# Altium PCB PCB1.PcbDoc
Units mm, origin at the board's own origin, x right, y up, seen from the top; angles counter-clockwise.
Board outline 112.14 x 90.93 mm, 2 copper layers (Top Layer, Bottom Layer); 45 components, 32 nets, 163 pads, 21 vias.
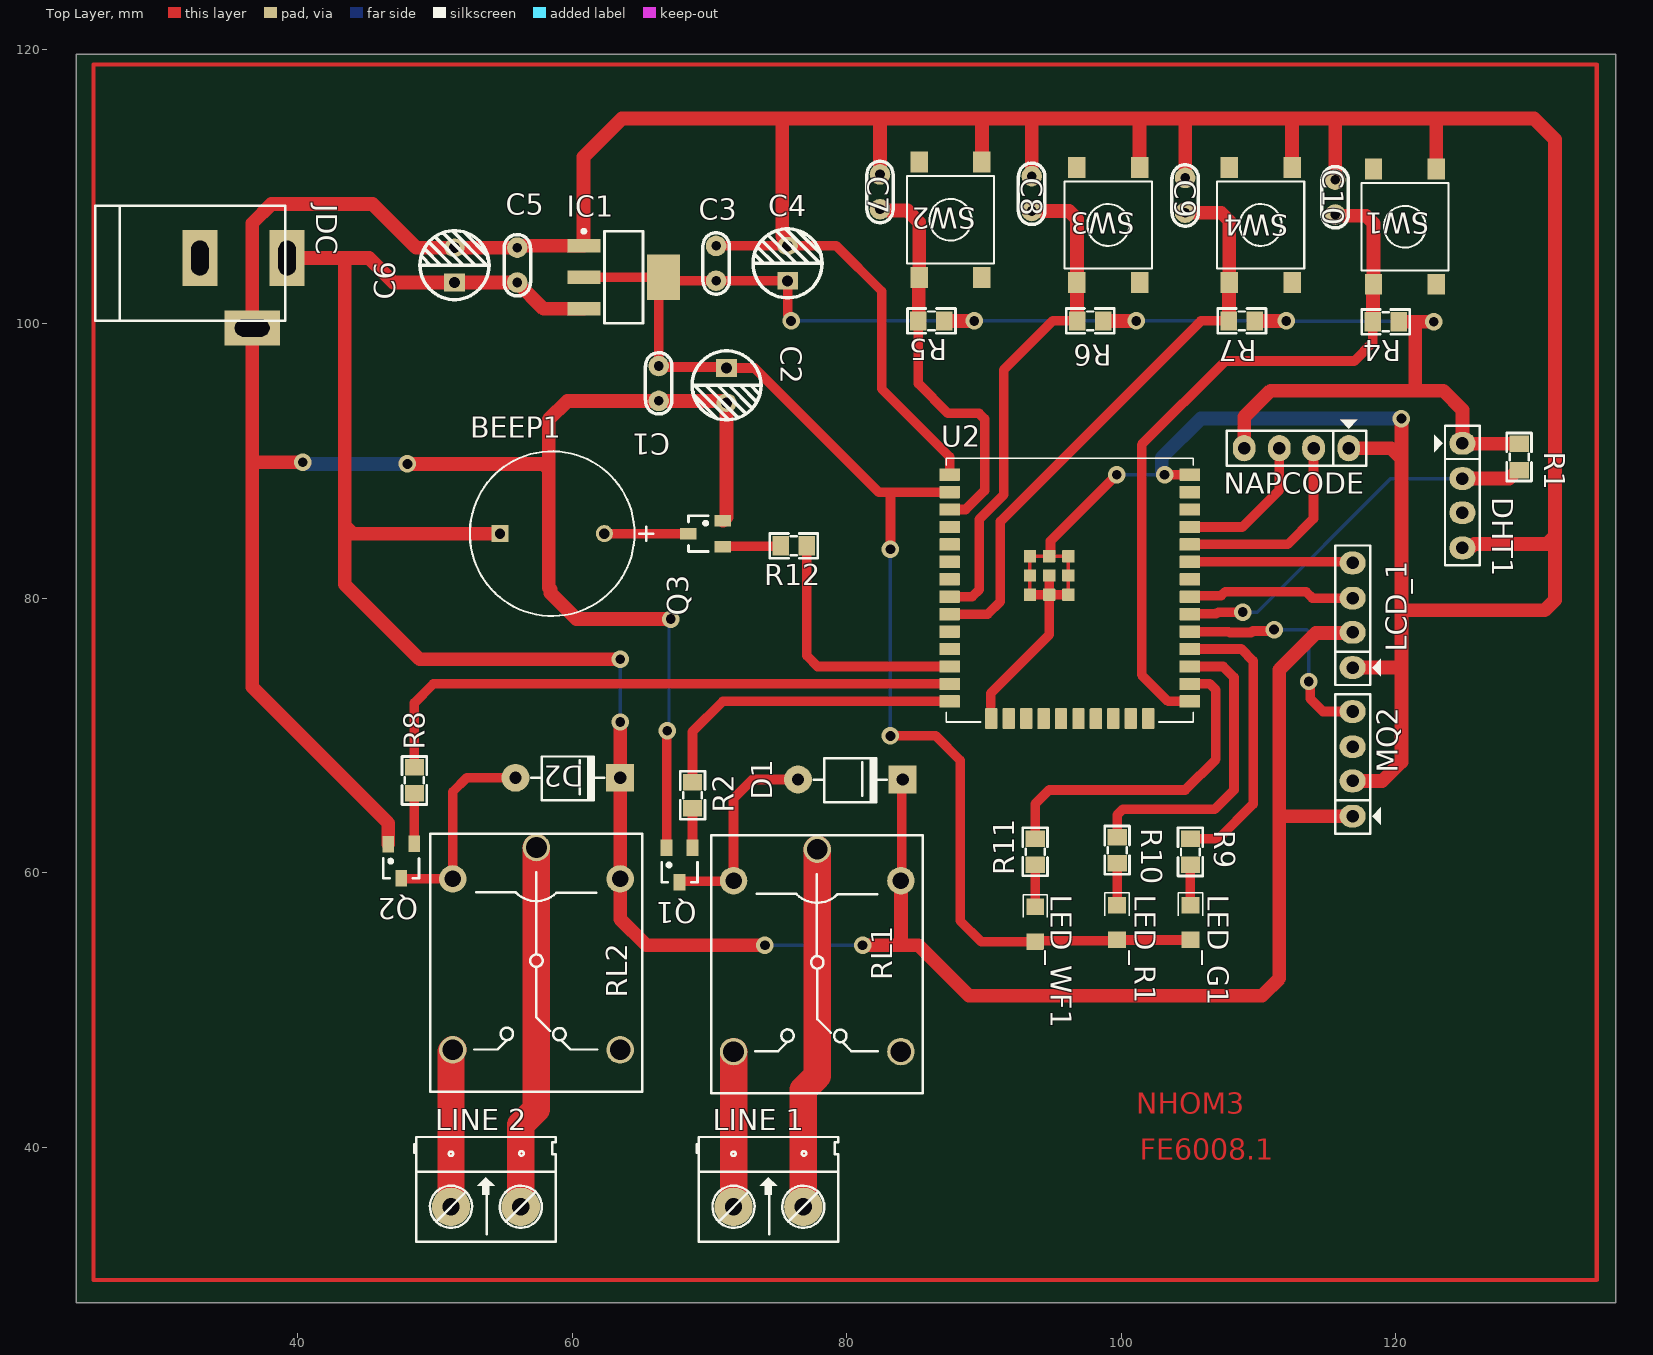
[diagram p0: Top Layer view]
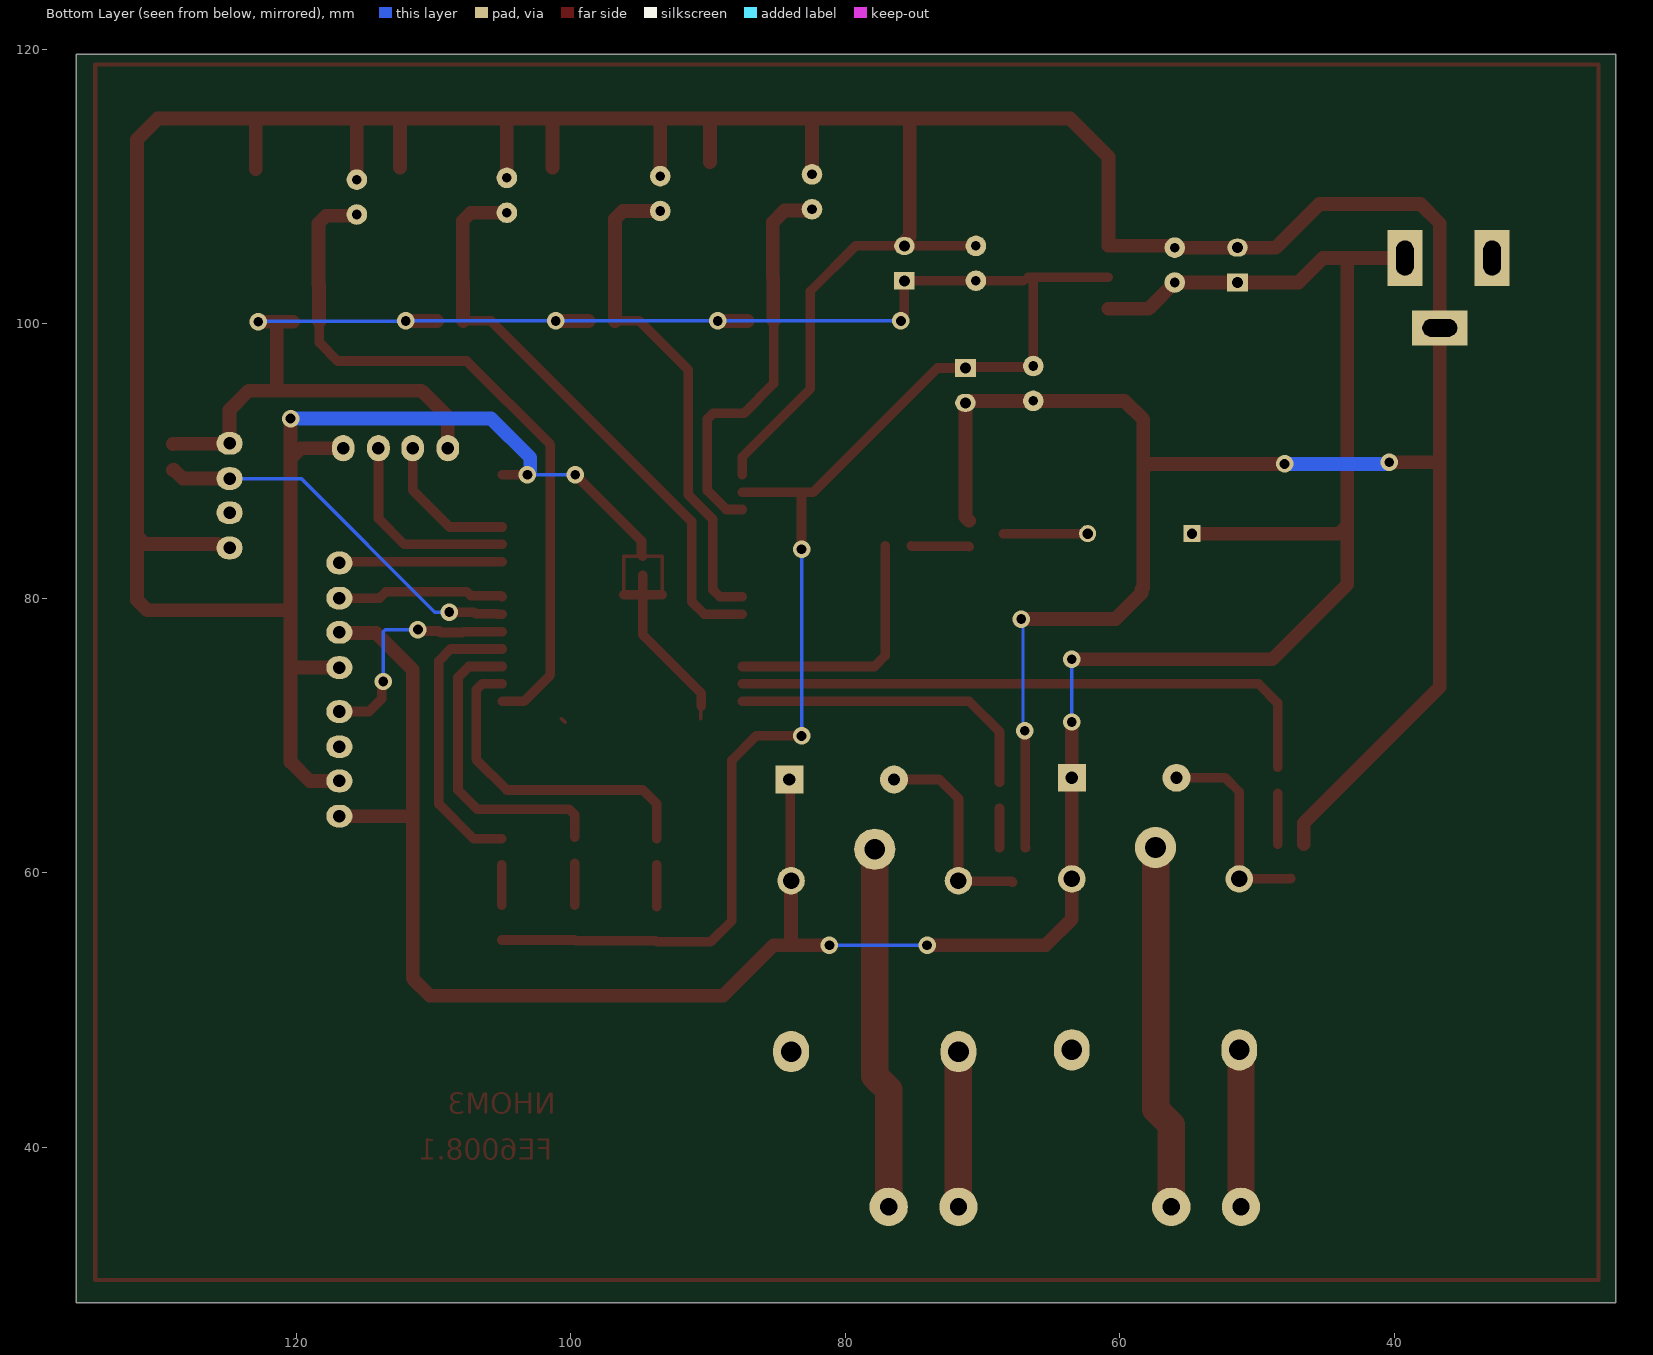
[diagram p1: Bottom Layer view, seen from below]
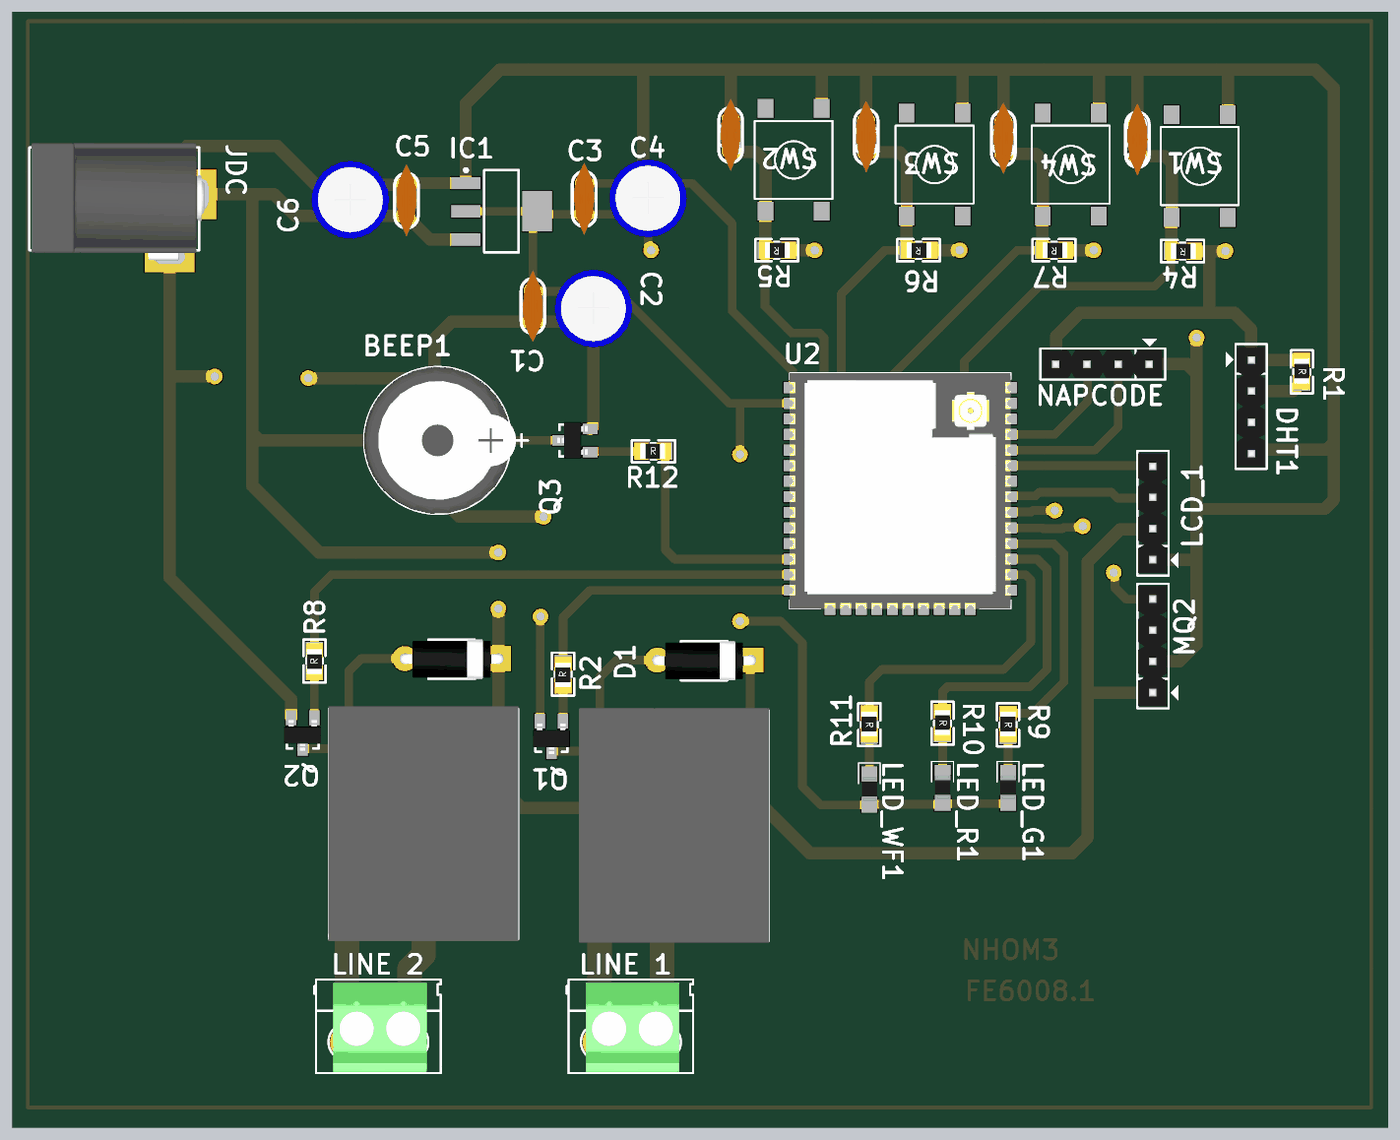
[diagram p2: 3D render of the assembled board from above, using the file's embedded part models]

## Layer stack, top to bottom
Top Solder: solder mask 0.0102, Solder Resist, Dk 3.5
Top Layer: signal copper 0.0356
Dielectric 1: dielectric 0.32, FR-4, Dk 4.8
Bottom Layer: signal copper 0.0356
Bottom Solder: solder mask 0.0102, Solder Resist, Dk 3.5

## Board outline
23.876,28.702 23.876,119.634 136.017,119.634 136.017,28.702

## Design rules (kind name [scope] priority, off if disabled: settings)
Clearance [All] p1: gap=0.5 ignorepadtopadclearanceinfootprint=FALSE
PolygonConnect [All] p1: connectstyle=Relief reliefconductorwidth=0.254 reliefentries=4 polygonreliefangle="90 Angle" airgapwidth=0.254
RoomDefinition Sheet1 [InComponentClass('Sheet1')] p1: confinementstyle=ConfineIn formatcopy=TRUE lockcomponents=FALSE outline 0,0 50.8,0 50.8,25.4 0,25.4
RoutingVias [All] p1: holewidth=0.711 width=1.27 viastyle="Through Hole" minholewidth=0.711 minwidth=1.27 maxholewidth=0.711 maxwidth=1.27
SolderMaskExpansion [All] p1: expansion=0.102 istentingtop=FALSE
Width [All] p1: maxlimit=2 minlimit=0.7 preferedwidth=1
30 further rules are at their usual default settings.

## Components (designator, comment, footprint, x,y, rotation, side; value= is the part's Value field where it differs from the comment)
BEEP1 "MCKPX-G1203A-K4056" FP-MCKPX-G1203A-K4056-MFG 58.547,84.709 r0 top
C1 "104" "tu gom" 66.307,95.645 r270 top
C2 "100uF" "tu hoa 5mm" 71.247,95.504 r270 top
C3 "104" "tu gom" 70.485,104.394 r90 top
C4 "100uF" "tu hoa 5mm" 75.692,104.394 r90 top
C5 "104" "tu gom" 56.007,104.267 r90 top
C6 "100uF" "tu hoa 5mm" 51.435,104.267 r90 top
C7 "104" "tu gom" 82.423,109.601 r90 top
C8 "104" "tu gom" 93.472,109.474 r90 top
C9 "104" "tu gom" 104.648,109.347 r90 top
C10 "104" "tu gom" 115.57,109.22 r90 top
D1 "100v" "DIODE 1A" 75.184,66.802 r180 top
D2 "100v" "DIODE 1A" 54.61,66.929 r180 top
DHT1 "DHT22" jp4 124.841,88.748 r270 top
IC1 "LM1117" SOT223-4N 63.754,103.378 r0 top value=LM317
JDC "Jac DC" DC-IN 36.068,102.235 r0 top
LCD_1 "LCD" jp4 116.84,77.495 r90 top
LED_G1 "LED_G" LED-0805 105.029,56.388 r90 top value="LED 3 ly Single Colour"
LED_R1 "LED" LED-0805 99.695,56.388 r90 top value="LED 3 ly Single Colour"
LED_WF1 "LED" LED-0805 93.726,56.261 r90 top value="LED 3 ly Single Colour"
"LINE 1" "CON 2 KF301" "Con 2 KF301 5.08" 71.755,35.687 r0 top
"LINE 2" "CON 2 KF301" "Con 2 KF301 5.08" 51.181,35.687 r0 top
MQ2 "LCD" jp4 116.84,66.675 r90 top
NAPCODE "LCD" jp4 114.021,90.932 r180 top
Q1 "C1815" SOT23B 67.818,60.579 r180 top
Q2 "C1815" SOT23B 47.549,60.858 r180 top
Q3 "C1815" SOT23B 69.723,84.709 r90 top
R1 "10k" "tro smd 0805" 129.032,90.297 r270 top
R2 "1k" "tro smd 0805" 68.707,65.659 r90 top
R4 "10k" "tro smd 0805" 119.253,100.076 r180 top
R5 "10k" "tro smd 0805" 86.171,100.142 r180 top
R6 "10k" "tro smd 0805" 97.728,100.142 r180 top
R7 "10k" "tro smd 0805" 108.777,100.142 r180 top
R8 "1k" "tro smd 0805" 48.453,66.737 r90 top
R9 "220" "tro smd 0805" 105.09,61.533 r270 top
R10 "220" "tro smd 0805" 99.756,61.66 r270 top
R11 "220" "tro smd 0805" 93.787,61.538 r270 top
R12 "1k" "tro smd 0805" 76.135,83.881 r0 top
RL1 "Relay" RL_SPDT_10A 77.851,61.722 r270 top value="Relay SPDT, 10A, 12V"
RL2 "Relay" RL_SPDT_10A 57.404,61.849 r270 top value="Relay SPDT, 10A, 12V"
SW1 "SW" SW4_SMD 120.65,107.061 r270 top value="SW chip 2 pin"
SW2 "SW" SW4_SMD 87.557,107.569 r270 top value="SW chip 2 pin"
SW3 "SW" SW4_SMD 99.042,107.188 r270 top value="SW chip 2 pin"
SW4 "SW" SW4_SMD 110.145,107.188 r270 top value="SW chip 2 pin"
U2 "ESP32-WROOM-32UE" ESP32-WROOM-32UE 96.242,90.194 r0 top

## Footprints (in the part's own frame and the unit in brackets; to place one, negate y for a bottom-side part, rotate by r counter-clockwise, add the part's x,y. Pads: shape width x height; smd on the part's side, far side on the other; paste and mask are expansions set on the pad)
"Con 2 KF301 5.08" [mil]
  round 110 hole 50: 1(0,0) 2(200,0)
  silkscreen extent -106,-100 300,200, body extent -45,-97 255,190, height 335
DC-IN [mil] "Jac DC input"
  rect 100x160 hole 50 slot 100 at 90 deg: 1(125,100) 2(-125,100)
  rect 160x100 hole 50 slot 100 at 0 deg: 3(25,-100)
  silkscreen extent -425,-80 120,250, body extent -418,-113 137,265, height 433
"DIODE 1A" [mil] "Diode 1A"
  round 80 hole 35: 1(-50,0)
  rect 80x80 hole 35: 2(-350,0)
  silkscreen extent -305,-61 -95,65, body extent -366,-61 -34,65, height 122
ESP32-WROOM-32UE [mm]
  rrect10% 1.5x0.9 smd: 1(-8.75,-1.19) 2(-8.75,-2.46) 3(-8.75,-3.73) 4(-8.75,-5) 5(-8.75,-6.27) 6(-8.75,-7.54) 7(-8.75,-8.81) 8(-8.75,-10.08) 9(-8.75,-11.35) 10(-8.75,-12.62) 11(-8.75,-13.89) 12(-8.75,-15.16) 13(-8.75,-16.43) 14(-8.75,-17.7) 25(8.75,-17.7) 26(8.75,-16.43) 27(8.75,-15.16) 28(8.75,-13.89) 29(8.75,-12.62) 30(8.75,-11.35) 31(8.75,-10.08) 32(8.75,-8.81) 33(8.75,-7.54) 34(8.75,-6.27) 35(8.75,-5) 36(8.75,-3.73) 37(8.75,-2.46) 38(8.75,-1.19)
  rrect10% 0.9x1.5 smd: 15(-5.715,-18.95) 16(-4.445,-18.95) 17(-3.175,-18.95) 18(-1.905,-18.95) 19(-0.635,-18.95) 20(0.635,-18.95) 21(1.905,-18.95) 22(3.175,-18.95) 23(4.445,-18.95) 24(5.715,-18.95)
  rrect10% 0.9x0.9 smd: 39(-2.9,-9.93) 39(-2.9,-8.53) 39(-2.9,-7.13) 39(-1.5,-9.93) 39(-1.5,-8.53) 39(-1.5,-7.13) 39(-0.1,-9.93) 39(-0.1,-8.53) 39(-0.1,-7.13)
  silkscreen extent -9,-19.2 9,0, body extent -9,-19.2 9,0, height 3.23
FP-MCKPX-G1203A-K4056-MFG [mm]
  rect 1.25x1.25 hole 0.75 paste-1000 mask+0: 1(-3.8,0)
  round 1.25 hole 0.75 paste-1000 mask+0: 2(3.8,0)
  silkscreen extent -6,-6 7.35,6, body extent -6.1,-6.1 6.1,6.1, height 0.25
jp4 [mil] "Jumper 4"
  oval 65x75 hole 36: 1(-100,0) 2(1,0) 3(99,0) 4(200,0)
  silkscreen extent -150,-81 250,50, body extent -141,-45 243,47, height 320
LED-0805 [mm] "Resistor SMD 80x50mil"
  rect 1.2x1.3 smd: 1(-1.27,0) 2(1.27,0)
  silkscreen extent 0.5,-0.89 2.16,0.89, body extent -0.97,-0.64 1.03,0.62, height 0.58
RL_SPDT_10A [mm] "Relay SPDT, 5 pin, 10A,W 650mil, L 800mil, H 800mil"
  round 2 / inner round 3 / far side round 3 hole 1.5: 1(0,0)
  round 2 / inner round 3 / far side oval 3x2.6 hole 1.5: 2(14.732,6.096) 3(14.732,-6.096)
  round 2 hole 1.2: 4(2.286,-6.096) 5(2.286,6.096)
  silkscreen extent -1.02,-7.72 17.78,7.7, body extent -1.17,-7.78 17.93,7.72, height 15.2
SOT23B [mm] "SOT 23B"
  rect 0.85x1.2 smd: 1(0.94,-1.245) 2(0,1.25) 3(-0.95,-1.25)
  silkscreen extent -1.31,-0.2 1.29,1.25, body extent -1.5,-1.07 1.5,1.43, height 1.05
SOT223-4N [mm] "SOT223, 4-Leads, Body 6.5x3.5mm, Pitch 2.3mm, Lead Span 7mm, IPC Medium Density"
  rect 2.4x1 smd: 1(-2.9,2.3) 2(-2.9,0) 3(-2.9,-2.3)
  rect 2.4x3.3 smd: 4(2.9,0)
  silkscreen extent -3.02,-3.35 1.4,3.47, body extent -1.85,-3.35 1.85,3.35, height 1.8
SW4_SMD [mil] "SW SMD button 4pin, 250 x250 mil"
  rect 60x50 smd: 1(-165,90) 2(165,-90) 3(165,90) 4(-165,-90)
  silkscreen extent -125,-125 125,125, body extent -180,-125 180,125, height 130
"tro smd 0805" [mm]
  rect 1.2x1.4 smd: 1(-0.946,-0.061) 2(0.954,-0.061)
  silkscreen extent -1.75,-0.97 1.75,0.84, body extent -1.56,-0.76 1.44,0.64, height 0.53
"tu gom" [mm] "Tu gom mini"
  round 1.5 hole 0.7: 1(-1.27,0) 2(1.27,0)
  silkscreen extent -2.25,-0.97 2.22,0.97, body extent -2.92,-0.85 2.92,0.85, height 6.12
"tu hoa 5mm" [mm]
  rect 1.3x1.5 hole 0.8: 1(-1.27,0)
  oval 1.3x1.5 hole 0.8: 2(1.27,0)
  silkscreen extent -2.51,-2.51 2.51,2.51, body extent -3.12,-3.18 3.23,3.18, height 14.55

## Part data
BEEP1: library part CMP-12433-000001-1, "MAGNETIC BUZZER AND TRANSDUCER - More Details", Current=30mA, Frequency=2300Hz, Manufacturer="Multicomp Pro", Max Supply Voltage=5V, Min Supply Voltage=2V, Operating Supply Voltage=3V, Package=0, Temperature="-20°C to +70°C", Temperature Range High=+70°C, Temperature Range Low=-20°C, Automotive=No, Category=Speak, ComponentLink2Description=Datasheet, ComponentLink2URL=http://www.farnell.com/datasheets/1498149.pdf?_ga=2.17855225.1157923166.1572356775-536200964.1569240579, Device Class L1=Electromechanical, Device Class L2="Audio Products", Device Class L3=Buzzers, Height=9.5mm, Lead Free=Yes, Manufacturer Part Number=MCKPX-G1203A-K4056, Octopart=https://octopart.com/mckpx-g1203a-k4056-multicomp-12157154, RoHS=TRUE, Standoff Height=0.5mm
C1 C3 C5 C7 C8 C9 C10: library part "Tu gom 104 50V", "Cắm", Chung_Loai=Cắm, Don_Vi=Con, Ma_Hang=MH004761, So_Chan=2, Ten_Linh_Kien="Tụ gốm 104 100nF 50V"
C2 C4 C6: library part "Tu Hoa 100uF 16V 5x11", "Cắm", Chung_Loai=Cắm, Don_Vi=Con, Ma_Hang=MH008417, So_Chan=2, Ten_Linh_Kien="Tụ Hóa 100uF 16V 5x11MM"
D1 D2: library part "Diode 1N4007", "Cắm", Chung_Loai=Cắm, Don_Vi=Con, Ma_Hang=MH001063, Ten_Linh_Kien="Diode 1N4007 1A (DIP)"
DHT1 LCD_1 MQ2 NAPCODE: library part DHT1x, "Humidity and Temperature Sensor"
IC1: "3v3"
JDC: library part DCIN, "Jac DC input"
LED_G1: library part LED, "LED Single colour Green and Red"
LED_R1 LED_WF1: "LED Single colour Green and Red"
"LINE 1" "LINE 2": "Cắm", Chung_Loai=Cắm, Don_Vi=Con, Ma_Hang=MH000987, Ten_Linh_Kien="CON 2 KF301-2P 5.08MM Xanh Dương"
Q1 Q2 Q3: "NPN 600mW, ECB"
R1 R2 R4 R5 R6 R7 R8 R12: library part "Tro 0805 5% 0R", "Dán", Chung_Loai=Dán, Don_Vi=Con, Ma_Hang=MH005230, So_Chan=2, Ten_Linh_Kien="Trở 0805 5% 0R"
R9 R10 R11: library part "Tro 0805 1% 1R", "Dán", Chung_Loai=Dán, Don_Vi=Con, Ma_Hang=MH004177, So_Chan=2, Ten_Linh_Kien="Trở 0805 1% 1R"
RL1 RL2: library part "Relay 1", "Relay SPDT 5 Pin"
SW1 SW2 SW3 SW4: library part SW2, "Switch button 2 pin"
U2: "Rx Txrx Module Wifi U.fl SMD", Manufacturer 1="Espressif Systems", Manufacturer Part Number 1=ESP32-WROOM-32UE(M113EH3200UH3Q0), Supplier Part Number 1=1965-ESP32-WROOM-32UE-N4TR-ND, Category="RF Receivers, Transceivers", Description 1="Rx Txrx Module Wifi U.fl SMD", Pricing 1="650=3,00000 (USD)", RoHS=No, Stock=10282, Supplier 1=Digi-Key

## Via types
v1: diameter 1.27, hole 0.711, Top Layer to Bottom Layer, 21 vias

## Nets (pads, with @x,y where several pads share a name; then routed paths per layer and width w, separated by ;. In a path a pad name is that pad's centre, name@x,y a point inside that pad or via, vN(x,y) a via of type N, cw(c..) or ccw(c..) an arc to the next point about the centre after c; other vN are vias at no path point)
3.3V: C1.1 C2.1 C3.1 C4.1 DHT1.1 IC1.2 IC1.4 LED_G1.1 LED_R1.1 LED_WF1.1 NAPCODE.4 R1.1 R4.1 R5.1 R6.1 R7.1 U2.2 | length 196.7
  Top Layer w0.254: NAPCODE.4 NAPCODE.4@108.941,91.059 ; 112.014,94.869 119.126,94.869 119.38,95.123
  Top Layer w0.7: IC1.2 IC1.4 66.307,103.031 C1.1 66.377,96.845 71.176,96.845 C2.1 73.279,96.774 82.319,87.734 83.312,87.734 ; IC1.4@67.056,103.124 C3.1 C4.1 75.692,100.611 75.946,100.357 v1(75.946,100.203) ; v1(83.185,69.977) 86.487,69.977 88.265,68.199 88.265,56.515 89.789,54.991 LED_WF1.1 93.789,55.054 99.632,55.054 LED_R1.1 LED_G1.1 ; v1(83.185,83.566) 83.185,87.607 83.312,87.734 ; U2.2 83.312,87.734
  Top Layer w1: R5.1 v1(89.281,100.203) ; R6.1 v1(101.092,100.203) ; NAPCODE.4@108.941,91.059 108.941,93.193 110.871,95.123 119.38,95.123 121.412,95.123 ; R7.1 v1(112.014,100.203) ; R4.1 121.473,100.137 ; v1(122.748,100.137) 121.473,100.137 ; R1.1 128.949,91.265 124.864,91.265 DHT1.1 124.841,93.726 123.444,95.123 121.412,95.123 ; 121.412,95.123 121.412,100.075 121.473,100.137
  Bottom Layer w0.254: v1(75.946,100.203) v1(89.281,100.203) v1(101.092,100.203) v1(112.014,100.203) 112.047,100.17 122.715,100.17 v1(122.748,100.137) ; v1(83.185,69.977) v1(83.185,83.566)
5V: BEEP1.1 C5.1 C6.1 D1.2 D2.2 IC1.3 JDC.1 LCD_1.2 MQ2.1 RL1.5 RL2.5 | length 196.9
  Top Layer w0.7: RL1.5 84.01,59.499 84.01,66.739 D1.2
  Top Layer w1: JDC.1 43.434,104.775 ; BEEP1.1 44.02,84.709 43.434,85.295 ; IC1.3 57.926,101.078 C5.1 C6.1 46.99,102.997 45.212,104.775 43.434,104.775 ; v1(63.5,70.993) D2.2 RL2.5 63.5,56.642 65.405,54.737 v1(74.041,54.737) ; v1(63.5,75.565) 48.895,75.565 43.434,81.026 43.434,85.295 ; v1(81.153,54.737) 83.947,54.737 ; RL1.5 83.947,54.737 ; MQ2.1 111.506,64.135 ; LCD_1.2 116.789,77.47 114.173,77.47 111.506,74.803 111.506,64.135 ; 43.434,85.295 43.434,104.775 ; 83.947,54.737 85.217,54.737 88.9,51.054 110.236,51.054 111.506,52.324 111.506,64.135
  Bottom Layer w0.254: v1(63.5,70.993) v1(63.5,75.565) ; v1(74.041,54.737) v1(81.153,54.737)
BEEP: R12.2 U2.12 | length 18.7
  Top Layer w0.7: R12.2 77.089,75.819 77.874,75.034 U2.12
DATA_DHT22: DHT1.2 R1.2 U2.30 | length 28.3
  Top Layer w0.7: U2.30 105.362,78.844 105.392,78.874 106.924,78.874 107.044,78.994 v1(108.839,78.994)
  Top Layer w1: DHT1.2 128.251,88.722 128.871,89.343 R1.2
  Bottom Layer w0.254: v1(108.839,78.994) 108.847,78.986 109.893,78.986 119.629,88.722 DHT1.2
DATA_MQ2: MQ2.4 U2.29 | length 17.2
  Top Layer w0.7: U2.29 107.831,77.574 107.896,77.509 109.454,77.509 109.56,77.615 111.016,77.615 v1(111.125,77.724) ; v1(113.64,73.939) 113.749,73.83 113.749,72.687 114.681,71.755 MQ2.4
  Bottom Layer w0.254: v1(111.125,77.724) 113.491,77.724 113.64,77.575 v1(113.64,73.939)
DOWN: C9.1 R7.2 SW4.2 U2.9 | length 43.4
  Top Layer w0.7: U2.9 90.268,78.844 91.186,79.762 91.186,85.598 105.791,100.203 R7.2
  Top Layer w1: C9.1 107.274,108.077 107.859,107.491 SW4.2 107.841,102.979 107.841,100.221 R7.2
GND: C1.2 C2.2 C3.2 C4.2 C5.2 C6.2 C7.2 C8.2 C9.2 C10.2 DHT1.4 IC1.1 JDC.3 LCD_1.1 MQ2.2 NAPCODE.1 Q1.1 Q2.1 Q3.1 SW1.1 SW2.1 SW3.1 SW4.1 U2.1 U2.15 U2.38 U2.39 | length 456.5
  Top Layer w0.254: C4.2 C4.2@75.885,105.664 ; U2.15 90.527,72.136 ; U2.39@93.342,80.264 93.342,81.664 93.342,83.064 94.742,83.064 96.142,83.064 96.142,81.664 U2.39@96.142,80.264 ; SW1.1 123.063,111.379 123.063,114.935
  Top Layer w0.7: Q1.1 66.904,61.849 66.904,70.333 v1(66.929,70.358) ; C3.2 C4.2 ; C4.2@75.885,105.664 79.248,105.664 82.55,102.362 82.55,95.25 87.492,90.308 U2.1 ; 90.497,72.136 90.497,73.098 94.742,77.343 U2.39@94.742,80.264 ; U2.39@93.342,80.264 U2.39@94.742,80.264 ; U2.39@94.742,81.664 U2.39@94.742,80.264 ; U2.39@94.742,83.064 94.842,83.164 94.842,84.174 v1(99.672,89.004) ; U2.39@96.142,80.264 U2.39@94.742,80.264 ; v1(103.147,89.004) U2.38
  Top Layer w1: v1(40.386,89.916) 36.703,89.916 ; Q2.1 46.609,63.627 36.703,73.533 36.703,89.916 ; v1(48.006,89.789) 57.912,89.789 58.293,89.408 ; IC1.1 IC1.1@60.833,105.678 ; v1(67.183,78.486) 60.325,78.486 58.42,80.391 58.42,80.645 58.293,80.772 58.293,89.408 ; Q3.1 70.993,85.649 71.247,85.903 C2.2 71.066,94.234 70.924,94.375 C1.2 59.655,94.375 58.293,93.013 58.293,89.408 ; C4.2 75.673,105.664 75.535,105.803 75.535,106.134 75.311,106.357 75.311,114.681 75.565,114.935 ; C7.2 82.423,114.935 ; SW2.1 89.843,114.935 ; C8.2 93.472,114.935 ; SW3.1 101.328,114.663 101.6,114.935 ; C9.2 104.648,114.808 104.775,114.935 ; SW4.1 112.431,114.935 ; C10.2 115.57,114.935 ; NAPCODE.1 119.634,90.932 120.396,90.17 ; MQ2.2 118.999,66.7 120.371,68.072 120.396,68.072 120.396,74.93 ; LCD_1.1 120.371,74.955 120.396,74.93 ; v1(120.396,93.091) 120.396,90.17 ; SW1.1 122.936,114.808 123.063,114.935 ; DHT1.4 124.966,83.792 125.553,83.792 125.708,83.947 130.986,83.947 131.572,84.533 ; 36.703,89.916 JDC.3 36.703,107.315 38.1,108.712 45.466,108.712 48.641,105.537 C6.2 C5.2 56.142,105.537 56.283,105.678 IC1.1@60.833,105.678 ; IC1.1@60.833,105.678 60.833,112.141 63.627,114.935 75.565,114.935 ; 75.565,114.935 82.423,114.935 ; 82.423,114.935 89.843,114.935 ; 89.843,114.935 93.472,114.935 ; 93.472,114.935 101.6,114.935 ; 101.6,114.935 104.775,114.935 ; 104.775,114.935 112.431,114.935 ; 112.431,114.935 115.57,114.935 ; 115.57,114.935 123.063,114.935 ; 120.396,74.93 120.396,79.121 ; 120.396,79.121 120.396,90.17 ; 120.396,79.121 130.81,79.121 131.572,79.883 131.572,84.533 ; 123.063,114.935 130.048,114.935 131.572,113.411 131.572,84.533
  Bottom Layer w0.254: v1(66.929,70.358) 67.056,70.485 67.056,78.359 v1(67.183,78.486) ; v1(99.672,89.004) v1(103.147,89.004)
  Bottom Layer w1: v1(40.386,89.916) 40.459,89.916 40.586,89.789 v1(48.006,89.789) ; v1(103.147,89.004) 103.147,89.077 102.935,89.289 102.935,90.235 105.791,93.091 v1(120.396,93.091)
LED_GREEN: R9.1 U2.28 | length 21
  Top Layer w0.7: U2.28 108.735,76.304 109.601,75.438 109.601,65.024 107.056,62.479 R9.1
LED_RED: R10.1 U2.27 | length 22.6
  Top Layer w0.7: R10.1 99.695,64.233 100.105,64.643 106.807,64.643 108.204,66.04 108.204,74.243 107.413,75.034 U2.27
LED_WIFI: R11.1 U2.26 | length 24.2
  Top Layer w0.7: R11.1 93.726,65.024 94.742,66.04 104.648,66.04 106.877,68.269 106.877,73.336 106.449,73.764 U2.26
MODE: C10.1 R4.2 SW1.2 U2.25 | length 52.8
  Top Layer w0.7: U2.25 103.401,72.494 101.473,74.422 101.473,91.186 107.569,97.282 116.967,97.282 118.299,98.614 R4.2
  Top Layer w1: C10.1 115.661,107.859 117.82,107.859 118.364,107.315 SW1.2 118.331,102.837 118.331,100.169 R4.2
NetBEEP1_2: BEEP1.2 Q3.2 | length 6.1
  Top Layer w0.7: BEEP1.2 Q3.2
NetD1_1: D1.1 Q1.2 RL1.4 | length 15.2
  Top Layer w0.7: Q1.2 67.872,59.382 71.701,59.382 RL1.4 71.755,65.405 73.152,66.802 D1.1
NetD2_1: D2.1 Q2.2 RL2.4 | length 15.1
  Top Layer w0.7: Q2.2 47.571,59.586 51.285,59.586 RL2.4 51.308,65.913 52.324,66.929 D2.1
NetLED_G1_2: LED_G1.2 R9.2 | length 2.9
  Top Layer w0.7: LED_G1.2 R9.2
NetLED_R1_2: LED_R1.2 R10.2 | length 3
  Top Layer w0.7: LED_R1.2 R10.2
NetLED_WF1_2: LED_WF1.2 R11.2 | length 3.1
  Top Layer w0.7: LED_WF1.2 R11.2
"NetLINE 1_1": "LINE 1.1" RL1.3 | length 11.3
  Top Layer w2: 71.755,35.687 RL1.3
"NetLINE 1_2": "LINE 1.2" RL1.1 | length 26.5
  Top Layer w2: 76.835,35.687 76.835,44.196 77.851,45.212 RL1.1
"NetLINE 2_1": "LINE 2.1" RL2.3 | length 11.5
  Top Layer w2: 51.181,35.687 51.181,46.99 RL2.3
"NetLINE 2_2": "LINE 2.2" RL2.1 | length 26.6
  Top Layer w2: 56.261,35.687 56.261,41.656 57.404,42.799 RL2.1
NetQ1_3: Q1.3 R2.1 | length 2.9
  Top Layer w0.7: Q1.3 R2.1
NetQ2_3: Q2.3 R8.1 | length 3.7
  Top Layer w0.7: Q2.3 48.506,62.116 48.506,65.783 R8.1
NetQ3_3: Q3.3 R12.1 | length 4.2
  Top Layer w0.7: Q3.3 71.004,83.789 75.158,83.789 R12.1
OUT1: R8.2 U2.13 | length 44.2
  Top Layer w0.7: R8.2 48.514,72.39 49.888,73.764 U2.13
OUT2: R2.2 U2.14 | length 23.3
  Top Layer w0.7: R2.2 68.768,70.292 70.97,72.494 U2.14
RESET: C7.1 R5.2 SW2.2 U2.3 | length 29.2
  Top Layer w0.7: R5.2 85.217,95.631 87.376,93.472 89.633,93.472 90.043,93.062 90.043,87.849 88.658,86.464 U2.3
  Top Layer w1: C7.1 82.519,108.235 84.424,108.235 85.271,107.388 SW2.2 85.244,103.351 85.244,100.23 R5.2
RX: NAPCODE.2 U2.34 | length 15.1
  Top Layer w0.254: U2.34 U2.34@105.096,83.82
  Top Layer w0.7: U2.34 112.118,83.924 113.995,85.801 NAPCODE.2
SCL: LCD_1.4 U2.33 | length 11.9
  Top Layer w0.7: U2.33 116.761,82.654 LCD_1.4
SDA: LCD_1.3 U2.31 | length 12.2
  Top Layer w0.7: U2.31 105.072,80.194 107.271,80.194 107.556,80.479 113.45,80.479 113.919,80.01 LCD_1.3
TX: NAPCODE.3 U2.35 | length 10.7
  Top Layer w0.7: U2.35 108.816,85.194 111.506,87.884 NAPCODE.3
UP: C8.1 R6.2 SW3.2 U2.8 | length 36.9
  Top Layer w0.7: U2.8 89.131,80.114 89.662,80.645 89.662,85.771 91.44,87.549 91.44,96.647 94.996,100.203 R6.2
  Top Layer w1: C8.1 96.188,108.204 96.774,107.618 96.774,103.015 SW3.2 96.765,102.988 96.765,100.212 R6.2
pads on no net: DHT1.3 JDC.2 MQ2.3 RL1.2 RL2.2 SW1.3 SW1.4 SW2.3 SW2.4 SW3.3 SW3.4 SW4.3 SW4.4 U2.4 U2.5 U2.6 U2.7 U2.10 U2.11 U2.16 U2.17 U2.18 U2.19 U2.20 U2.21 U2.22 U2.23 U2.24 U2.32 U2.36 U2.37
copper on no net: | length 396.4
  Top Layer w0.254: 100.409,70.966 100.687,71.244
  Top Layer w0.3: 25.146,30.353 134.62,30.353 134.62,118.872 25.146,118.872 25.146,30.353

## Other copper
Top Layer:
  text "NHOM3" at 101.081,42.47 h1.52
  text "FE6008.1" at 101.346,39.116 h1.52